# Altium PCB Speedometer_Tech.PcbDoc (part 3 of 4)
Units mm, origin at the board's own origin, x right, y up, seen from the top; angles counter-clockwise.
Board outline 309.2 x 103.7 mm, 4 copper layers (Top Layer, MidLayer1, MidLayer2, Bottom Layer), stack 0.603 mm thick; 246 components, 310 nets, 1253 pads, 701 vias.
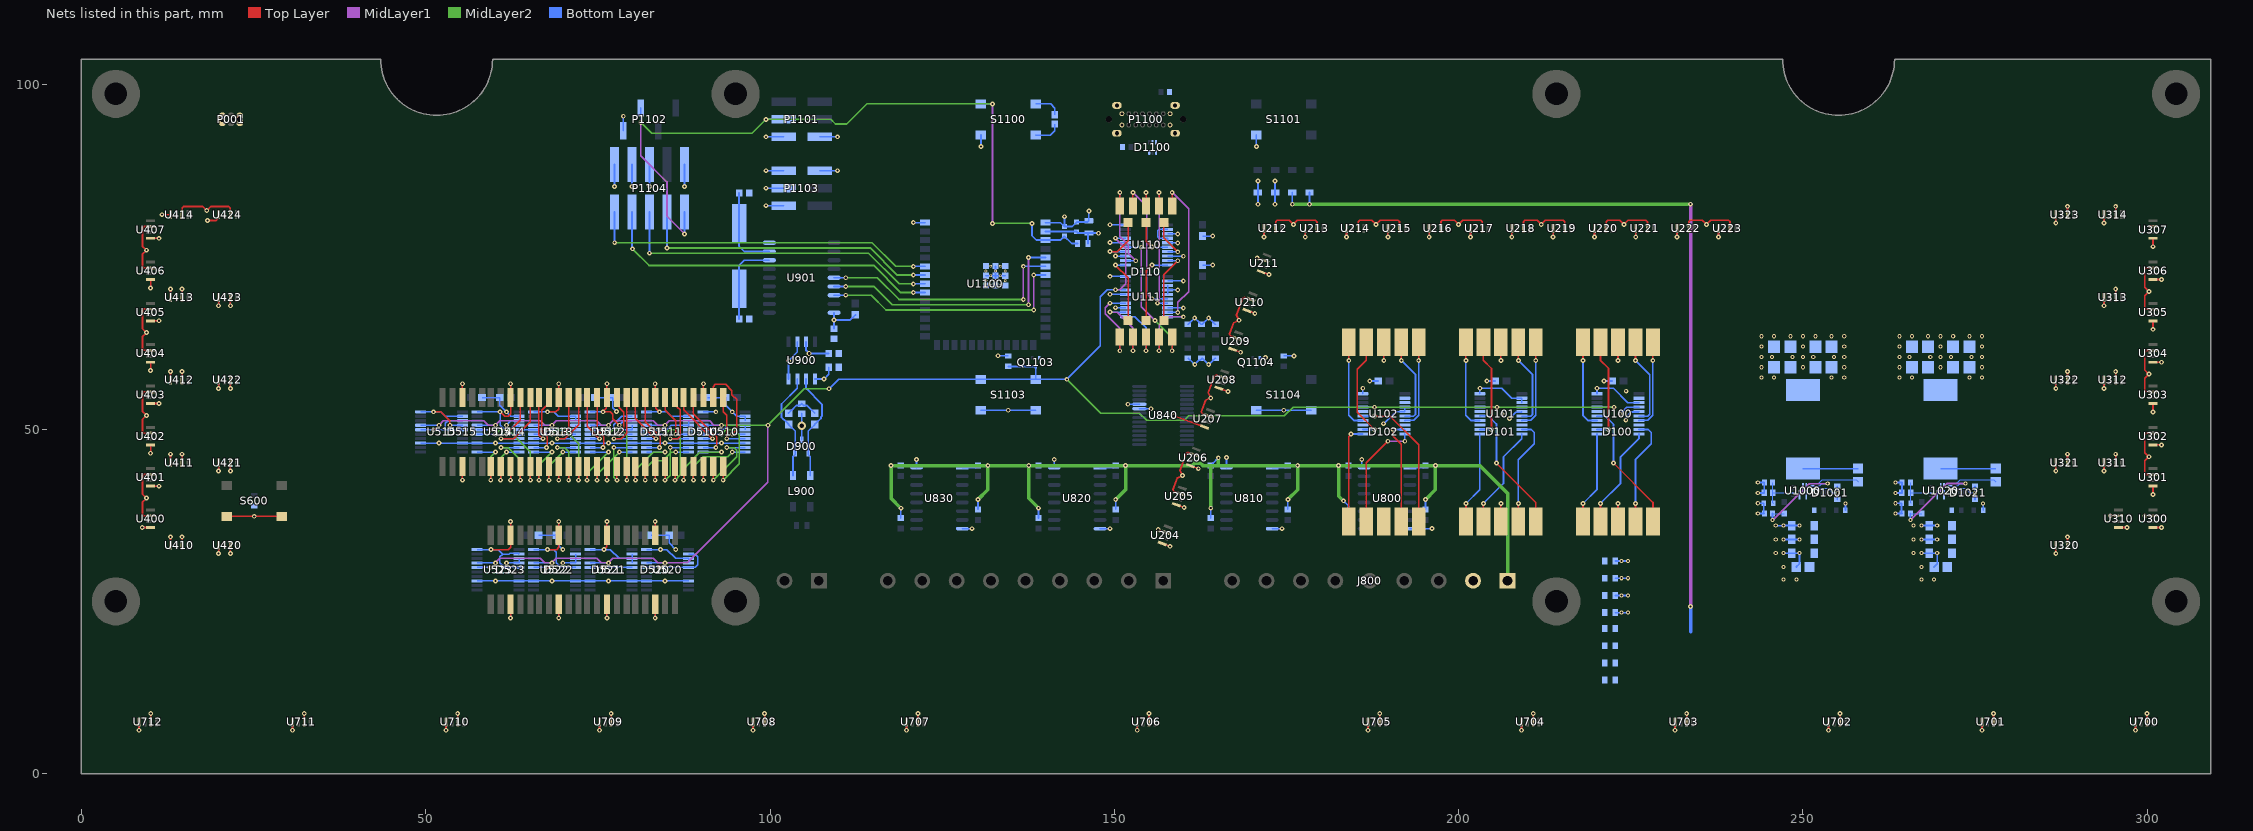
[diagram p4: the nets of this part, all layers, seen from the top]

## Via types
v1: diameter 0.7, hole 0.3, Top Layer to Bottom Layer, 568 vias
v2: diameter 0.6, hole 0.3, Top Layer to Bottom Layer, 96 vias
v3: diameter 1.27, hole 0.711, Top Layer to Bottom Layer, 33 vias
v4: diameter 0.7, hole 0.4, Top Layer to Bottom Layer, 4 vias

## Nets (pads, with @x,y where several pads share a name; then routed paths per layer and width w, separated by ;. In a path a pad name is that pad's centre, name@x,y a point inside that pad or via, vN(x,y) a via of type N, cw(c..) or ccw(c..) an arc to the next point about the centre after c; other vN are vias at no path point)
3V3: C901.2 C903.2 C1007.1 C1008.1 C1009.1 C1010.1 C1011.1 C1102.1 C1103.2 L1001.2 P1103.2 P1104.1 R840.2 R841.2 R842.2 R903.2 R1004.2 R1100.1 S600.3 S600.4 U800.16 U810.16 U820.16 U830.16 U840.9 U900.5 U901.18 U1100.2 | length 47.7
  Top Layer w0.254: S600.3@21.125,37.35 S600.4@29.075,37.35
  Bottom Layer w0.254: v1(77.42,85.231) P1104.1@77.42,88.43 ; v1(99.411,87.54) P1103.2@101.995,87.54 ; U900.5@106.505,57.3 v1(107.86,57.3) 108.525,57.965 C901.2@108.525,59 ; C903.2@109.3,64.606 v1(109.3,65.875) ; U901.18@109.3,66.92 v1(109.3,65.875) ; R903.2@112.395,66.622 112.395,66.585 111.991,66.181 111.954,66.181 111.648,65.875 v1(109.3,65.875) ; U830.16@121.275,44.445 v1(121.275,45.593) ; U1100.2@140,78.73 144.471,78.73 C1102.1@144.526,78.675 144.716,78.485 C1103.2@146.304,78.485 ; U820.16@141.275,44.445 v1(141.275,45.593) ; R1100.1@146.165,76.962 146.165,78.346 C1103.2@146.304,78.485 ; v1(147.701,78.458) 147.674,78.485 C1103.2@146.304,78.485 ; U840.9@153.65,52.975 v1(155.345,52.975) ; R840.2@160.655,65.235 160.755,65.235 161.028,65.508 161.028,65.511 v1(161.671,66.154) 162.314,65.511 162.314,65.508 162.587,65.235 R841.2@162.687,65.235 162.787,65.235 R841.2@163.06,65.508 ; R841.2@163.06,65.511 v1(163.703,66.154) R842.2@164.346,65.511 ; R842.2@164.346,65.508 164.619,65.235 R842.2@164.719,65.235 ; U810.16@166.275,44.445 v1(166.275,45.87) ; U800.16@185.928,44.45 v1(185.928,45.598) ; v2(243.45,40.75) R1004.2@244.375,40.75 244.4,40.775 C1007.1@244.4,42.25 v2(243.45,42.25)
  other v1: 25.1,37.35
  other v2: 250,59 248.5,60.5 250,60.5 251.5,60.5 250,62 248.176,63.5 250,63.5 251.824,63.5
5V: C902.2 C1027.1 C1028.1 C1029.1 C1030.1 C1031.1 D100.A D101.A D102.A D110.14 D510.A D511.A D512.A D513.A D514.A D515.A D520.A D521.A D522.A D523.A D1103.1 D1104.1 L1021.2 P001.3 P1103.1 R1024.2 R1103.2 R1104.2 U100.3 U100.5 U100.20 U101.2 U101.3 U101.5 U101.20 U102.4 U102.5 U102.20 U110.2 U110.4 U110.5 U110.20 U111.3 U111.4 U111.5 U111.20 U204.2 U205.2 U206.2 U207.2 U208.2 U209.2 U210.2 U211.2 U212.2 U213.2 U214.2 U215.2 U216.2 U217.2 U218.2 U219.2 U220.2 U221.2 U222.2 U223.2 U300.2 U301.2 U302.2 U303.2 U304.2 U305.2 U306.2 U307.2 U310.2 U311.2 U312.2 U313.2 U314.2 U320.2 U321.2 U322.2 U323.2 U400.2 U401.2 U402.2 U403.2 U404.2 U405.2 U406.2 U407.2 U410.2 U411.2 U412.2 U413.2 U414.2 U420.2 U421.2 U422.2 U423.2 U424.2 U510.20 U511.2 U511.20 U512.3 U512.20 U513.2 U513.3 U513.20 U514.4 U514.20 U515.2 U515.4 U515.20 U520.3 U520.4 U520.20 U521.2 U521.3 U521.4 U521.20 U522.5 U522.20 U523.2 U523.5 U523.20 U700.2 U701.2 U702.2 U703.2 U704.2 U705.2 U706.2 U707.2 U708.2 U709.2 U710.2 U711.2 U712.2 U900.3 | length 403
  Top Layer w0.2: v1(51.13,52.525) 52.2,52.525 53.5,51.225 53.5,50.586 v1(53.51,50.575) ; v1(55.32,42.6) D515.A@55.32,44.6 ; D515.A@55.32,54.6 v1(55.32,56.6) ; v1(59.48,32.525) 61.995,32.525 62.32,32.85 D523.A@62.32,34.6 v1(62.32,36.6) ; v1(60.8,52.525) 60.8,52.516 61.441,51.875 61.98,51.875 62.36,52.256 62.36,52.794 62.32,52.834 D514.A@62.32,54.6 v1(62.32,56.6) ; v1(62.32,22.6) D523.A@62.32,24.6 ; v1(62.32,42.6) D514.A@62.32,44.6 ; v1(67.68,32.525) 68.991,32.525 69.32,32.854 D522.A@69.32,34.6 v1(69.32,36.6) ; v1(67.68,52.525) 68.908,52.525 69.283,52.9 69.283,54.563 D513.A@69.32,54.6 v1(69.32,56.6) ; v1(69.32,22.6) D522.A@69.32,24.6 ; v1(69.32,42.6) D513.A@69.32,44.6 ; v1(75.88,32.525) 76.32,32.965 D521.A@76.32,34.6 v1(76.32,36.6) ; v1(76.32,22.6) D521.A@76.32,24.6 ; v1(76.32,42.6) D512.A@76.32,44.6 ; v1(76.32,56.6) D512.A@76.32,54.6 76.222,54.502 76.222,53.017 v1(75.73,52.525) 76.8,52.525 77.18,52.144 77.18,51.505 v1(78.11,50.575) ; v1(83.32,22.6) D520.A@83.32,24.6 ; D520.A@83.32,34.6 v1(83.32,36.6) ; v1(83.32,42.6) D511.A@83.32,44.6 ; v1(83.32,56.6) D511.A@83.32,54.6 83.438,54.482 83.438,53.017 v1(83.93,52.525) ; v1(90.32,42.6) D510.A@90.32,44.6 ; D510.A@90.32,54.6 v1(90.32,56.6) ; D110.14@154.6,82.398 v1(154.6,84.398)
  Top Layer w0.254: U400.2@10.05,37.425 9.064,37.425 8.858,37.631 8.858,39.408 v1(9.45,40) 8.858,40.592 8.858,43.19 9.093,43.425 U401.2@10.05,43.425 ; U402.2@10.05,49.425 9.064,49.425 8.858,49.631 8.858,51.408 v1(9.45,52) 8.858,52.592 8.858,55.19 9.093,55.425 U403.2@10.05,55.425 ; U404.2@10.05,61.45 9.064,61.45 8.858,61.656 8.858,63.433 v1(9.45,64.025) 8.858,64.617 8.858,67.215 9.093,67.45 U405.2@10.05,67.45 ; U406.2@10.05,73.425 9.064,73.425 8.858,73.631 8.858,75.408 v1(9.45,76) 8.858,76.592 8.858,79.19 9.093,79.425 U407.2@10.05,79.425 ; U712.2@10.069,7.5 v1(10.069,8.72) ; U410.2@14.625,33.15 v1(14.625,34.37) ; U411.2@14.625,45.15 v1(14.625,46.37) ; U412.2@14.625,57.15 v1(14.625,58.37) ; U413.2@14.625,69.15 v1(14.625,70.37) ; U414.2@14.625,81.15 14.625,82.136 14.831,82.342 17.608,82.342 v1(18.2,81.75) 18.792,82.342 21.39,82.342 21.625,82.107 U424.2@21.625,81.15 ; v1(21.625,31.93) U420.2@21.625,33.15 ; v1(21.625,43.93) U421.2@21.625,45.15 ; v1(21.625,55.93) U422.2@21.625,57.15 ; v1(21.625,67.93) U423.2@21.625,69.15 ; U711.2@32.356,7.5 v1(32.356,8.72) ; U710.2@54.642,7.5 v1(54.642,8.72) ; U709.2@76.929,7.5 v1(76.929,8.72) ; U708.2@99.216,7.5 v1(99.216,8.72) ; U707.2@121.503,7.5 v1(121.503,8.72) ; U706.2@155.025,7.5 v1(155.025,8.72) ; v1(156.382,35.422) U204.2@157.528,35.005 ; U205.2@159.58,40.643 158.654,40.98 158.53,41.244 159.138,42.914 v1(159.897,43.268) 159.543,44.026 160.432,46.468 160.733,46.608 U206.2@161.632,46.281 ; U207.2@163.684,51.919 162.758,52.256 162.634,52.52 163.242,54.19 v1(164.001,54.544) 163.647,55.302 164.536,57.744 164.837,57.884 U208.2@165.736,57.557 ; U209.2@167.788,63.195 166.862,63.532 166.738,63.796 167.346,65.466 v1(168.105,65.82) 167.751,66.578 168.64,69.02 168.941,69.16 U210.2@169.84,68.833 ; v1(170.746,74.888) U211.2@171.892,74.471 ; U212.2@173.425,79.15 173.425,80.136 173.631,80.342 175.408,80.342 v1(176,79.75) 176.592,80.342 179.19,80.342 179.425,80.107 U213.2@179.425,79.15 ; U214.2@185.425,79.15 185.425,80.136 185.631,80.342 187.408,80.342 v1(188,79.75) 188.592,80.342 191.19,80.342 191.425,80.107 U215.2@191.425,79.15 ; U705.2@188.547,7.5 v1(188.547,8.72) ; v1(189.133,59.994) D102.A@189.133,62.6 ; U216.2@197.425,79.15 197.425,80.136 197.631,80.342 199.408,80.342 v1(200,79.75) 200.592,80.342 203.19,80.342 203.425,80.107 U217.2@203.425,79.15 ; D101.A@206.133,36.6 v1(206.133,39.206) ; v1(206.133,59.994) D101.A@206.133,62.6 ; U218.2@209.425,79.15 209.425,80.136 209.631,80.342 211.408,80.342 v1(212,79.75) 212.592,80.342 215.19,80.342 215.425,80.107 U219.2@215.425,79.15 ; U704.2@210.834,7.5 v1(210.834,8.72) ; U220.2@221.425,79.15 221.425,80.136 221.631,80.342 223.408,80.342 v1(224,79.75) 224.592,80.342 227.19,80.342 227.425,80.107 U221.2@227.425,79.15 ; D100.A@223.133,36.6 v1(223.133,39.206) ; v1(223.133,59.994) D100.A@223.133,62.6 ; U703.2@233.12,7.5 v1(233.12,8.72) ; U222.2@233.425,79.15 233.425,80.136 233.631,80.342 235.408,80.342 v1(236,79.75) 236.592,80.342 239.19,80.342 239.425,80.107 U223.2@239.425,79.15 ; U702.2@255.407,7.5 v1(255.407,8.72) ; U701.2@277.694,7.5 v1(277.694,8.72) ; U320.2@288.425,33.15 v1(288.425,34.37) ; U321.2@288.425,45.15 v1(288.425,46.37) ; U322.2@288.425,57.15 v1(288.425,58.37) ; U323.2@288.425,81.15 v1(288.425,82.37) ; v1(294.63,37.425) U310.2@295.85,37.425 ; U311.2@295.425,45.15 v1(295.425,46.37) ; U312.2@295.425,57.15 v1(295.425,58.37) ; U313.2@295.425,69.15 v1(295.425,70.37) ; U314.2@295.425,81.15 v1(295.425,82.37) ; v1(299.63,37.425) U300.2@300.85,37.425 ; U700.2@299.981,7.5 v1(299.981,8.72) ; U301.2@300.85,43.425 299.864,43.425 299.658,43.631 299.658,45.408 v1(300.25,46) 299.658,46.592 299.658,49.19 299.893,49.425 U302.2@300.85,49.425 ; U303.2@300.85,55.425 299.864,55.425 299.658,55.631 299.658,57.408 v1(300.25,58) 299.658,58.592 299.658,61.19 299.893,61.425 U304.2@300.85,61.425 ; U305.2@300.85,67.425 299.864,67.425 299.658,67.631 299.658,69.408 v1(300.25,70) 299.658,70.592 299.658,73.19 299.893,73.425 U306.2@300.85,73.425
  Bottom Layer w0.2: U515.20@49.27,52.525 v1(51.13,52.525) 52.2,52.525 52.85,51.875 U515.2@55.37,51.875 ; v1(53.51,50.575) U515.4@55.37,50.575 ; U523.20@57.47,32.525 v1(59.48,32.525) 60.502,32.525 61.152,31.875 ; U514.20@57.47,52.525 v1(60.8,52.525) 60.8,50.566 61.441,49.925 62.15,49.925 62.675,50.45 63.445,50.45 U514.4@63.57,50.575 ; U523.5@63.57,29.925 61.441,29.925 60.78,30.586 60.78,31.503 61.152,31.875 ; U523.2@63.57,31.875 63.445,32 62.218,32 62.093,31.875 61.152,31.875 ; U522.20@65.67,32.525 v1(67.68,32.525) 68.6,32.525 68.98,32.144 68.98,30.586 69.641,29.925 U522.5@71.77,29.925 ; U513.20@65.67,52.525 67.53,52.525 67.536,52.519 68.055,52.519 68.061,52.525 68.6,52.525 69.25,51.875 U513.2@71.77,51.875 U513.3@71.77,51.225 ; U521.20@73.87,32.525 v1(75.88,32.525) 76.8,32.525 78.1,31.225 U521.3@79.97,31.225 ; U512.20@73.87,52.525 v1(75.73,52.525) ; v1(78.11,50.575) 78.76,51.225 U512.3@79.97,51.225 ; U521.4@79.97,30.575 U521.3@79.97,31.225 ; U521.2@79.97,31.875 U521.3@79.97,31.225 ; U520.20@82.07,32.525 85,32.525 86.3,31.225 U520.3@88.17,31.225 U520.4@88.17,30.575 ; U511.20@82.07,52.525 v1(83.93,52.525) 85,52.525 85.65,51.875 U511.2@88.17,51.875 ; U510.20@90.27,52.525 v1(92.13,52.525) ; v1@133.121,60.65 R1103.2@134.6,60.65 ; v1@149.357,72.187 U111.20@151.636,72.187 ; v1@149.357,79.68 U110.20@151.636,79.68 ; U111.5@157.736,69.587 U111.4@157.736,70.237 ; U111.3@157.736,70.887 U111.4@157.736,70.237 ; U110.2@157.736,79.03 156.561,79.03 156.337,78.805 156.337,77.93 156.537,77.73 U110.4@157.736,77.73 U110.5@157.736,77.08 v1@159.215,77.08 ; v1@159.215,70.237 U111.4@157.736,70.237 ; R1104.2@174.6,60.65 v1@176.079,60.65
  Bottom Layer w0.254: U900.3@105.235,62.7 105.235,61.446 v4(105.681,61) C902.2@108.525,61 ; P1103.1@107.205,87.54 v1(109.789,87.54) ; v1(170.85,82.667) D1104.1@170.85,84.362 v1(170.85,86.057) ; v1(173.35,82.667) D1103.1@173.35,84.362 v1(173.35,86.057) ; U102.20@186.083,55.15 v1(186.083,55.945) ; v1(189.103,50.8) 190.853,52.55 U102.5@192.183,52.55 U102.4@192.183,53.2 ; U101.20@203.083,55.15 v1(203.083,55.945) 206.282,55.945 207.727,54.5 U101.2@209.183,54.5 U101.3@209.183,53.85 ; v1(207.391,51.562) 208.056,52.227 208.056,52.231 208.277,52.452 209.085,52.452 U101.5@209.183,52.55 ; U100.20@220.083,55.15 v1(220.083,55.945) 222.491,55.945 224.586,53.85 U100.3@226.183,53.85 ; v1(224.282,51.308) 224.3,51.326 224.3,51.816 224.983,52.499 226.133,52.499 U100.5@226.183,52.55 ; v2(263.45,40.75) 264.375,40.75 264.4,40.775 C1027.1@264.4,42.25 v2(263.45,42.25)
  other v1: 84.08,32.525 176.079,60.635 133.121,60.665 159.215,70.222 149.357,72.202 159.215,77.065 149.357,79.695
  other v2: 270,59 268.5,60.5 270,60.5 271.5,60.5 270,62 268.176,63.5 270,63.5 271.824,63.5
CAN_H: D900.2 L900.1 R901.1 U900.7 | length 16
  Bottom Layer w0.254: L900.1@103.35,43.275 103.35,46.03 103.65,46.33 D900.2@103.65,46.525 103.65,49.735 103.141,50.244 103.104,50.244 102.7,50.648 R901.1@102.7,50.685 102.7,50.721 102.054,51.367 102.011,51.367 101.669,51.709 101.669,53.663 103.965,55.959 U900.7@103.965,57.3
CAN_L: D900.1 L900.2 R900.2 U900.6 | length 16
  Bottom Layer w0.254: U900.6@105.235,57.3 105.235,55.928 107.531,53.632 107.531,51.895 107.412,51.776 107.412,51.59 107.189,51.367 107.182,51.367 106.941,51.125 106.904,51.125 106.5,50.721 R900.2@106.5,50.685 106.5,50.648 106.096,50.244 106.059,50.244 105.55,49.735 D900.1@105.55,46.525 105.55,46.33 105.85,46.03 L900.2@105.85,43.275
CS: U901.16 U1100.7 | length 36.7
  MidLayer1 w0.254: v1(138.303,67.31) v1(138.303,72.39)
  MidLayer2 w0.254: v1(110.995,69.46) 114.69,69.46 116.84,67.31 v1(138.303,67.31)
  Bottom Layer w0.254: U901.16@109.3,69.46 v1(110.995,69.46) ; v1(138.303,72.39) 138.313,72.38 U1100.7@140,72.38
D\I\G\-\R\S\T\: Q1103.3 R1103.1 S1103.3 S1103.4 U100.17 U101.17 U102.17 U110.17 U111.17 U510.17 U511.17 U512.17 U513.17 U514.17 U515.17 U520.17 U521.17 U522.17 U523.17 | length 301.5
  MidLayer1 w0.2: v1(51.93,50.575) 52.58,51.225 58.411,51.225 59.061,50.575 v1(60.13,50.575) 60.78,51.225 66.611,51.225 67.261,50.575 v1(68.33,50.575) 68.98,51.225 74.811,51.225 75.461,50.575 v1(76.53,50.575) 77.18,51.225 83.011,51.225 83.661,50.575 v1(84.73,50.575) 85.38,51.225 91.211,51.225 91.861,50.575 v1(92.93,50.575) ; v1(60.13,30.575) 60.78,31.225 66.611,31.225 67.261,30.575 v1(68.33,30.575) 68.98,31.225 74.811,31.225 75.461,30.575 v1(76.53,30.575) 77.18,31.225 83.011,31.225 83.661,30.575 v1(84.73,30.575) 87.979,30.575 99.695,42.291 v1(99.695,50.575) ; v1(150.157,70.252) 150.776,70.252 151.636,71.112 151.636,76.266 v1(150.157,77.745)
  MidLayer2 w0.2: v1(92.93,50.575) v1(99.695,50.575) 105,55.88 v1(108.585,55.88) ; v1(143.102,57.25) 148.027,52.325 153.65,52.325 154.674,51.301 160.176,51.301 160.818,51.943 174.712,51.943 175.969,53.2 v1(187.778,53.2) v1(205.578,53.2) v1(222.578,53.2)
  Bottom Layer w0.2: U515.17@49.27,50.575 v1(51.93,50.575) ; U523.17@57.47,30.575 v1(60.13,30.575) ; U514.17@57.47,50.575 v1(60.13,50.575) ; U522.17@65.67,30.575 v1(68.33,30.575) ; U513.17@65.67,50.575 v1(68.33,50.575) ; U521.17@73.87,30.575 v1(76.53,30.575) ; U512.17@73.87,50.575 v1(76.53,50.575) ; U520.17@82.07,30.575 v1(84.73,30.575) ; U511.17@82.07,50.575 v1(84.73,50.575) ; U510.17@90.27,50.575 v1(92.93,50.575) ; S1103.4@138.575,57.25 v1(143.102,57.25) 147.955,62.103 147.955,69.215 148.992,70.252 v1(150.157,70.252) ; v1@150.157,70.237 U111.17@151.636,70.237 ; v1@150.157,77.73 U110.17@151.636,77.73
  Bottom Layer w0.254: v1(108.585,55.88) 109.955,57.25 S1103.3@130.625,57.25 S1103.4@138.575,57.25 Q1103.3@138.575,59.102 134.648,59.102 R1103.1@134.6,59.15 ; U102.17@186.083,53.2 v1(187.778,53.2) ; U101.17@203.083,53.2 v1(205.578,53.2) ; U100.17@220.083,53.2 v1(222.578,53.2)
EN: C1101.1 P1101.4 P1102.3 P1104.10 R1100.2 S1100.3 U1100.3 | length 114.9
  MidLayer1 w0.254: v1(81.23,94.555) 81.23,89.7 85.04,85.89 85.04,80.911 v1(87.58,78.371) ; v1(132.32,79.895) v1(132.32,97.25)
  MidLayer2 w0.2: v1@132.32,79.883 v1(138.049,79.883)
  MidLayer2 w0.254: v1(81.23,94.555) 82.821,92.964 97.375,92.964 v1(99.411,95) 108.832,95 109.513,94.319 111.151,94.319 114.082,97.25 v1(132.32,97.25)
  Bottom Layer w0.254: v1(81.23,94.555) P1102.3@81.23,96.655 ; v1(87.58,78.371) P1104.10@87.58,81.57 ; v1(99.411,95) P1101.4@101.995,95 ; S1100.3@130.625,97.25 v1(132.32,97.25) ; v1(138.049,79.883) 138.049,78.105 138.694,77.46 U1100.3@140,77.46 142.168,77.46 C1101.1@142.748,78.04 143.826,76.962 R1100.2@144.665,76.962
GND: C900.2 C901.1 C902.1 C903.1 C904.1 C905.1 C1001.2 C1002.2 C1003.2 C1004.1 C1005.2 C1008.2 C1009.2 C1010.2 C1011.2 C1021.2 C1022.2 C1023.2 C1024.1 C1025.2 C1028.2 C1029.2 C1030.2 C1031.2 C1101.2 C1102.2 C1103.1 D900.3 D1001.1 D1001.2 D1021.1 D1021.2 D1100.2 D1100.3 D1100.4 D1100.6 P001.1 P1100.A1 P1100.A12 P1100.B1 P1100.B12 P1100.M_GND P1101.5 P1101.6 P1102.4 P1103.4 P1103.6 P1104.3 P1104.5 P1104.9 Q1103.2 Q1104.2 R000.2 R001.2 R002.2 R003.2 R100.2 R101.2 R102.2 R110.2 R111.2 R510.2 R511.2 R512.2 R513.2 R514.2 R515.2 R520.2 R521.2 R522.2 R523.2 R600.1 R843.1 R844.1 R845.1 R1002.1 R1005.1 R1022.1 R1025.1 R1101.2 R1102.2 S1100.1 S1101.1 S1103.1 S1103.2 S1104.1 S1104.2 U100.2 U100.4 U100.8 U100.13 U100.16 U101.4 U101.8 U101.13 U101.16 U102.2 U102.3 U102.8 U102.13 U102.16 U110.3 U110.8 U110.13 U110.16 U111.2 U111.8 U111.13 U111.16 U204.4 U205.4 U206.4 U207.4 U208.4 U209.4 U210.4 U211.4 U212.4 U213.4 U214.4 U215.4 U216.4 U217.4 U218.4 U219.4 U220.4 U221.4 U222.4 U223.4 U300.4 U301.4 U302.4 U303.4 U304.4 U305.4 U306.4 U307.4 U310.4 U311.4 U312.4 U313.4 U314.4 U320.4 U321.4 U322.4 U323.4 U400.4 U401.4 U402.4 U403.4 U404.4 U405.4 U406.4 U407.4 U410.4 U411.4 U412.4 U413.4 U414.4 U420.4 U421.4 U422.4 U423.4 U424.4 U510.2 U510.3 U510.4 U510.5 U510.8 U510.13 U510.16 U511.3 U511.4 U511.5 U511.8 U511.13 U511.16 U512.2 U512.4 U512.5 U512.8 U512.13 U512.16 U513.4 U513.5 U513.8 U513.13 U513.16 U514.2 U514.3 U514.5 U514.8 U514.13 U514.16 U515.3 U515.5 U515.8 U515.13 U515.16 U520.2 U520.5 U520.8 U520.13 U520.16 U521.5 U521.8 U521.13 U521.16 U522.2 U522.3 U522.4 U522.8 U522.13 U522.16 U523.3 U523.4 U523.8 U523.13 U523.16 U700.4 U701.4 U702.4 U703.4 U704.4 U705.4 U706.4 U707.4 U708.4 U709.4 U710.4 U711.4 U712.4 U800.8 U810.8 U820.8 U830.8 U840.10 U900.2 U900.8 U901.9 U1000.2 U1000.10 U1020.2 U1020.10 U1100.1 U1100.40 U1100.41 | length 426.1
  Top Layer w0.254: v1(8.368,6.28) U712.4@8.368,7.5 ; v1(8.83,35.725) U400.4@10.05,35.725 ; U401.4@10.05,41.725 v1(11.27,41.725) ; v1(10.05,46.505) U402.4@10.05,47.725 ; U403.4@10.05,53.725 v1(11.27,53.725) ; v1(10.05,58.505) U404.4@10.05,59.725 ; U405.4@10.05,65.75 v1(11.27,65.75) ; v1(10.05,70.505) U406.4@10.05,71.725 ; U407.4@10.05,77.725 v1(11.27,77.725) ; v1(11.705,81.15) U414.4@12.925,81.15 ; U410.4@12.925,33.15 v1(12.925,34.37) ; U411.4@12.925,45.15 v1(12.925,46.37) ; U412.4@12.925,57.15 v1(12.925,58.37) ; U413.4@12.925,69.15 v1(12.925,70.37) ; v1(18.295,80.3) 19.515,80.3 19.842,80.627 19.925,80.71 U424.4@19.925,81.15 ; v1(19.925,31.93) U420.4@19.925,33.15 ; v1(19.925,43.93) U421.4@19.925,45.15 ; v1(19.925,55.93) U422.4@19.925,57.15 ; v1(19.925,67.93) U423.4@19.925,69.15 ; v1(30.655,6.28) U711.4@30.655,7.5 ; v1(52.942,6.28) U710.4@52.942,7.5 ; v1(75.229,6.28) U709.4@75.229,7.5 ; v1(97.516,6.28) U708.4@97.516,7.5 ; v1(119.803,6.28) U707.4@119.803,7.5 ; v1(153.325,6.28) U706.4@153.325,7.5 ; U204.4@156.947,33.407 v1(158.093,32.99) ; v1(158.626,51.951) U207.4@163.103,50.321 ; U205.4@158.999,39.045 v1(160.145,38.628) ; U206.4@161.051,44.683 v1(162.197,44.266) ; U208.4@165.155,55.959 v1(166.488,55.474) ; U209.4@167.207,61.597 v1(168.353,61.18) ; U210.4@169.259,67.235 v1(170.405,66.818) ; U211.4@171.311,72.873 v1(172.457,72.456) ; v1(171.725,77.93) U212.4@171.725,79.15 ; v1(177.725,77.93) U213.4@177.725,79.15 ; v1(183.725,77.93) U214.4@183.725,79.15 ; v1(186.846,6.28) U705.4@186.846,7.5 ; v1(189.725,77.93) U215.4@189.725,79.15 ; v1(195.725,77.93) U216.4@195.725,79.15 ; v1(201.725,77.93) U217.4@201.725,79.15 ; v1(207.725,77.93) U218.4@207.725,79.15 ; v1(209.133,6.28) U704.4@209.133,7.5 ; v1(213.725,77.93) U219.4@213.725,79.15 ; v1(219.725,77.93) U220.4@219.725,79.15 ; v1(225.725,77.93) U221.4@225.725,79.15 ; v1(231.42,6.28) U703.4@231.42,7.5 ; v1(231.725,77.93) U222.4@231.725,79.15 ; v1(237.725,77.93) U223.4@237.725,79.15 ; v1(253.707,6.28) U702.4@253.707,7.5 ; v1(275.994,6.28) U701.4@275.994,7.5 ; v1(286.725,31.93) U320.4@286.725,33.15 ; v1(286.725,43.93) U321.4@286.725,45.15 ; v1(286.725,55.93) U322.4@286.725,57.15 ; v1(286.725,79.93) U323.4@286.725,81.15 ; v1(293.725,43.93) U311.4@293.725,45.15 ; v1(293.725,55.93) U312.4@293.725,57.15 ; v1(293.725,67.93) U313.4@293.725,69.15 ; v1(293.725,79.93) U314.4@293.725,81.15 ; U310.4@295.85,35.725 v1(297.07,35.725) ; v1(298.281,6.28) U700.4@298.281,7.5 ; U300.4@300.85,35.725 v1(302.07,35.725) ; v1(300.85,40.505) U301.4@300.85,41.725 ; U302.4@300.85,47.725 v1(302.07,47.725) ; v1(300.85,52.505) U303.4@300.85,53.725 ; U304.4@300.85,59.725 v1(302.07,59.725) ; v1(300.85,64.505) U305.4@300.85,65.725 ; U306.4@300.85,71.725 v1(302.07,71.725) ; v1(300.85,76.505) U307.4@300.85,77.725
  Bottom Layer w0.15: U1000.10@251.4,41.25 252.261,41.25 252.436,41.425 253.583,41.425 254.258,40.75 v2(255,40.75) ; U1020.10@271.4,41.25 272.261,41.25 272.436,41.425 273.583,41.425 274.258,40.75 v2(275,40.75)
  Bottom Layer w0.2: U515.13@49.27,47.975 v1(51.93,47.975) U515.8@55.37,47.975 U514.13@57.47,47.975 v1(60.13,47.975) U514.8@63.57,47.975 U513.13@65.67,47.975 v1(68.33,47.975) U513.8@71.77,47.975 U512.13@73.87,47.975 v1(76.53,47.975) U512.8@79.97,47.975 U511.13@82.07,47.975 v1(84.73,47.975) U511.8@88.17,47.975 U510.13@90.27,47.975 v1(92.93,47.975) U510.8@96.37,47.975 ; U515.16@49.27,49.925 v1(51.13,49.925) 52.845,49.925 ; U515.5@55.37,49.925 52.845,49.925 ; U515.3@55.37,51.225 53.241,51.225 52.86,50.844 52.86,49.94 52.845,49.925 ; U523.13@57.47,27.975 v1(60.13,27.975) U523.8@63.57,27.975 U522.13@65.67,27.975 v1(68.33,27.975) U522.8@71.77,27.975 U521.13@73.87,27.975 v1(76.53,27.975) U521.8@79.97,27.975 U520.13@82.07,27.975 v1(84.73,27.975) U520.8@88.17,27.975 ; U523.16@57.47,29.925 v1(59.33,29.925) ; U514.16@57.47,49.925 v1(59.33,49.925) ; R515.2@58.186,54.6 R514.2@60.755,54.6 60.755,53.489 61.71,52.534 v1(61.71,52.525) 62.36,51.875 U514.2@63.57,51.875 U514.3@63.57,51.225 62.36,51.225 v1(61.71,50.575) ; v1(61.71,30.575) U523.4@63.57,30.575 U523.3@63.57,31.225 ; U514.5@63.57,49.925 U513.16@65.67,49.925 v1(67.53,49.925) U513.5@71.77,49.925 U513.4@71.77,50.575 ; U522.16@65.67,29.925 v1(67.53,29.925) ; R523.2@66.386,34.6 R522.2@68.955,34.6 68.955,33.48 v1(69.91,32.525) ; v1(69.91,30.575) U522.4@71.77,30.575 U522.3@71.77,31.225 U522.2@71.77,31.875 ; U521.16@73.87,29.925 v1(75.73,29.925) U521.5@79.97,29.925 ; U512.16@73.87,49.925 v1(75.73,49.925) 77.298,49.925 ; R513.2@74.586,54.6 R512.2@77.155,54.6 77.155,53.147 v1(77.724,52.578) ; U512.4@79.97,50.575 U512.5@79.97,49.925 77.298,49.925 ; U512.2@79.97,51.875 78.491,51.875 77.298,50.682 77.298,49.925 ; U520.16@82.07,29.925 v1(83.93,29.925) U520.5@88.17,29.925 88.212,29.967 89.149,29.967 89.47,30.288 89.47,31.473 89.068,31.875 U520.2@88.17,31.875 ; U511.16@82.07,49.925 v1(83.93,49.925) 83.936,49.919 84.455,49.919 84.461,49.925 85,49.925 85.65,50.575 U511.4@88.17,50.575 ; R521.2@82.786,34.6 R520.2@85.355,34.6 85.355,33.48 v1(86.31,32.525) ; U511.5@88.17,49.925 U511.4@88.17,50.575 ; U511.3@88.17,51.225 U511.4@88.17,50.575 ; U510.16@90.27,49.925 v1(92.13,49.925) 92.136,49.919 92.655,49.919 92.661,49.925 93.2,49.925 93.85,50.575 U510.4@96.37,50.575 U510.5@96.37,49.925 ; R511.2@90.985,54.6 R510.2@93.555,54.6 93.555,53.48 v1(94.51,52.525) 95.16,51.875 U510.2@96.37,51.875 U510.3@96.37,51.225 ; v1@149.357,69.587 U111.16@151.636,69.587 ; v1@149.357,77.08 U110.16@151.636,77.08 ; v1@150.157,67.637 U111.13@151.636,67.637 ; v1@150.157,75.13 U110.13@151.636,75.13 ; U111.8@157.736,67.637 v1@160.015,67.637 ; U111.2@157.736,71.537 v1@160.015,71.537 ; U110.8@157.736,75.13 v1@160.015,75.13 ; U110.3@157.736,78.38 v1@159.215,78.38 ; R111.2@162.814,73.84 v1@164.293,73.84 ; R110.2@162.814,78.052 v1@164.293,78.052 ; Q1104.2@171.125,60.397 v1(171.958,60.397) ; v2(246.05,36) v2(247.2,36)
  Bottom Layer w0.254: P1102.4@78.69,93.345 v1(78.69,95.445) ; v1(79.96,85.231) P1104.3@79.96,88.43 ; v1(82.5,85.231) P1104.5@82.5,88.43 ; v1(87.58,85.231) P1104.9@87.58,88.43 ; v1(99.411,82.46) P1103.6@101.995,82.46 ; v1(99.411,85) P1103.4@101.995,85 ; v1(99.411,92.46) P1101.6@101.995,92.46 ; U900.8@102.695,57.3 v4(102.695,59.944) 103.965,61.214 U900.2@103.965,62.7 ; D900.3@104.6,48.475 v3(104.6,50.5) C900.2@104.6,52.275 ; P1101.5@107.205,92.46 v1(109.789,92.46) ; v1(120.805,80) U1100.40@122.5,80 ; U830.8@127.925,35.555 v1(129.35,35.555) ; S1103.1@130.625,52.75 v1(134.6,52.75) S1103.2@138.575,52.75 ; v1(130.625,91.055) S1100.1@130.625,92.75 ; U1100.41@131.35,72.28 U1100.41@132.05,72.28 U1100.41@132.75,72.28 ; U1100.41@132.75,70.88 U1100.41@132.75,71.58 U1100.41@132.75,72.28 ; U1100.41@132.75,73.68 U1100.41@132.75,72.98 U1100.41@132.75,72.28 ; U1100.41@134.15,72.28 U1100.41@133.45,72.28 U1100.41@132.75,72.28 ; U1100.1@140,80 142.188,80 C1101.2@142.748,79.44 ; v1(142.748,80.865) C1101.2@142.748,79.44 ; v1(146.304,81.7) C1103.1@146.304,80.275 146.104,80.075 C1102.2@144.526,80.075 143.891,79.44 C1101.2@142.748,79.44 ; U820.8@147.925,35.555 v1(149.35,35.555) ; v1(151.955,53.625) U840.10@153.65,53.625 ; R843.1@160.755,60.306 160.755,60.275 161.028,60.002 161.06,60.002 v1(161.687,59.375) 161.687,59.403 162.286,60.002 162.483,60.002 162.787,60.306 R844.1@163.06,60.033 ; R844.1@163.06,60.03 v1(163.703,59.387) R845.1@164.346,60.03 ; R845.1@164.346,60.033 164.619,60.306 R845.1@164.719,60.306 ; S1104.1@170.625,52.75 v1(174.6,52.75) S1104.2@178.575,52.75 ; v1(170.625,91.055) S1101.1@170.625,92.75 ; U810.8@172.925,35.555 v1(174.35,35.555) ; v1(187.098,57) R102.2@188.318,57 ; U800.8@192.925,35.56 v1(196.116,35.56) ; v1(204.098,57) R101.2@205.318,57 ; v1(221.098,57) R100.2@222.318,57 ; R003.2@222.75,23.361 224.403,23.361 224.48,23.438 v2@224.573,23.438 ; R002.2@222.75,25.861 224.403,25.861 224.48,25.938 v2@224.573,25.938 ; R001.2@222.75,28.361 224.403,28.361 224.48,28.438 v2@224.573,28.438 ; R000.2@222.75,30.861 224.403,30.861 224.48,30.938 v2@224.573,30.938 ; v1(223.424,52.204) 224.42,53.2 U100.4@226.183,53.2 ; v2@243.373,39.25 v2(243.45,39.25) R1005.1@244.323,39.25 244.323,37.827 C1005.2@244.4,37.75 v2(243.45,37.75) ; v2(247.2,32) C1001.2@248.35,32 v2(249.5,32) 249.5,30.45 C1004.1@249.05,30 ; v2(247.2,34) C1002.2@248.35,34 v2(249.5,34) ; v2(247.2,36) C1003.2@248.35,36 v2(249.5,36) ; D1001.2@255,39.8 v2(255,40.75) D1001.1@255,41.7 ; R1002.1@256.177,38.25 v2(256.177,39.2) ; v2@263.373,39.25 v2(263.45,39.25) R1025.1@264.323,39.25 264.323,37.827 C1025.2@264.4,37.75 v2(263.45,37.75) ; v2(267.2,32) C1021.2@268.35,32 v2(269.5,32) 269.5,30.45 C1024.1@269.05,30 ; v2(267.2,34) C1022.2@268.35,34 v2(269.5,34) ; v2(267.2,36) C1023.2@268.35,36 v2(269.5,36) ; D1021.2@275,39.8 v2(275,40.75) D1021.1@275,41.7 ; R1022.1@276.177,38.25 v2(276.177,39.2)
  other v1: 206.329,52.225 224.339,55.525 160.015,67.622 150.157,67.652 149.357,69.602 160.015,71.522 164.293,73.825 160.015,75.115 150.157,75.145 149.357,77.095 164.293,78.037 159.215,78.365
  other v2: 223.662,23.361 224.573,23.361 223.662,25.861 224.573,25.861 247.2,28.15 249.05,28.15 267.2,28.15 269.05,28.15 223.662,28.361 224.573,28.361 247.2,30 267.2,30 223.662,30.861 224.573,30.861 246.05,32 266.05,32 246.05,34 266.05,34 266.05,36 244,57.5 245.824,57.5 254.176,57.5 256,57.5 264,57.5 265.824,57.5 274.176,57.5 276,57.5 244,59 256,59 264,59 276,59 244,60.5 245.5,60.5 254.5,60.5 256,60.5 264,60.5 265.5,60.5 274.5,60.5 276,60.5 244,62 256,62 264,62 276,62 244,63.5 245.824,63.5 254.176,63.5 256,63.5 264,63.5 265.824,63.5 274.176,63.5 276,63.5
KL30: J800.1 R004.1 R005.1 R006.1 R007.1 R800.1 R801.1 R802.1 R803.1 R810.1 R811.1 R812.1 R813.1 R820.1 R821.1 R822.1 R823.1 R830.1 R831.1 R832.1 R833.1 U800.1 U810.1 U820.1 U830.1 | length 186.5
  MidLayer2 w0.508: v1(117.575,44.752) v1@117.575,44.728 ; v1(119,38.534) 117.575,39.959 v1@117.575,44.728 ; v1(130.2,39.784) 131.625,41.209 v1@131.625,44.728 ; v1(131.625,44.752) v1@131.625,44.728 ; v1(139,38.534) 137.575,39.959 v1(137.575,44.728) ; v1(150.2,39.784) 151.625,41.209 v1(151.625,44.728) ; v1(164,38.534) 164,44.728 ; v1(165.1,45.847) 165.1,44.728 ; v1(175.2,39.784) 176.625,41.209 v1(176.625,44.728) ; v1(183.261,39.6) 182.575,40.286 v1(182.575,44.728) ; v1(195.2,39.784) 196.625,41.209 v1(196.625,44.728) ; J800.1@207.1,28 207.1,40.677 203.049,44.728 v1(196.625,44.728) ; v1@117.575,44.728 v1@131.625,44.728 ; v1@131.625,44.728 v1(137.575,44.728) ; v1(137.575,44.728) v1(151.625,44.728) ; v1(151.625,44.728) 161.295,44.728 161.637,45.07 162.53,45.07 162.872,44.728 164,44.728 ; 164,44.728 165.1,44.728 ; 165.1,44.728 v1(176.625,44.728) ; v1(176.625,44.728) v1(182.575,44.728) ; v1(182.575,44.728) v1(196.625,44.728)
  Bottom Layer w0.254: v1(117.575,44.752) R833.1@119,44.752 ; R832.1@119,37.108 v1(119,38.534) ; U830.1@127.925,44.445 129.917,44.445 R830.1@130.2,44.728 ; R831.1@130.2,38.359 v1(130.2,39.784) ; R830.1@130.2,44.752 v1(131.625,44.752) ; v1(137.575,44.728) R823.1@139,44.728 ; R822.1@139,37.108 v1(139,38.534) ; U820.1@147.925,44.445 149.917,44.445 R820.1@150.2,44.728 v1(151.625,44.728) ; R821.1@150.2,38.359 v1(150.2,39.784) ; R812.1@164,37.108 v1(164,38.534) ; R813.1@164,44.752 164.05,44.752 164.329,45.031 164.329,45.081 165.095,45.847 v1(165.1,45.847) ; U810.1@172.925,44.445 174.917,44.445 R810.1@175.2,44.728 v1(176.625,44.728) ; R811.1@175.2,38.359 v1(175.2,39.784) ; v1(182.575,44.728) R803.1@184,44.728 ; v1(183.261,39.6) 184,38.861 R802.1@184,37.108 ; U800.1@192.925,44.445 194.917,44.445 R800.1@195.2,44.728 v1(196.625,44.728) ; R801.1@195.2,38.359 v1(195.2,39.784)
KL30i: C1001.1 C1002.1 C1003.1 C1004.2 C1021.1 C1022.1 C1023.1 C1024.2 D1101.1 D1102.1 R004.2 R005.2 R006.2 R007.2 R1001.2 R1021.2 U1000.1 U1020.1 | length 123.3
  MidLayer1 w0.508: v1(233.68,24.257) v1(233.68,82.677)
  MidLayer2 w0.508: v1(175.85,82.667) v1(178.35,82.667) 233.67,82.667 v1(233.68,82.677)
  Bottom Layer w0.254: v1(175.85,82.667) D1102.1@175.85,84.362 ; v1(178.35,82.667) D1101.1@178.35,84.362
  Bottom Layer w0.508: 233.68,20.574 v1(233.68,24.257)
KL31: J800.2 R000.1 R001.1 R002.1 R003.1
MISO: U901.15 U1100.5 | length 38.7
  MidLayer1 w0.254: v1(137.541,68.072) v1(137.541,74.93)
  MidLayer2 w0.254: v1(110.995,70.73) 111.004,70.739 115.062,70.739 117.729,68.072 v1(137.541,68.072)
  Bottom Layer w0.254: U901.15@109.3,70.73 v1(110.995,70.73) ; v1(137.541,74.93) 137.551,74.92 U1100.5@140,74.92
MOSI: U901.14 U1100.6 | length 36.8
  MidLayer1 w0.254: v1(136.779,68.834) v1(136.779,73.66)
  MidLayer2 w0.254: v1(110.995,72) 111.004,72.009 115.57,72.009 118.745,68.834 v1(136.779,68.834)
  Bottom Layer w0.254: U901.14@109.3,72 v1(110.995,72) ; v1(136.779,73.66) 136.789,73.65 U1100.6@140,73.65
MTCK: P1104.4 U1100.32 | length 50.5
  MidLayer2 w0.254: v1(80.01,76.2) 82.423,73.787 115.062,73.787 119.009,69.84 v1(120.805,69.84)
  Bottom Layer w0.254: P1104.4@79.96,81.57 79.96,76.25 v1(80.01,76.2) ; v1(120.805,69.84) U1100.32@122.5,69.84
MTDI: P1104.8 U1100.34 | length 44.3
  MidLayer2 w0.254: v1(85.032,76.327) 114.554,76.327 118.501,72.38 v1(120.805,72.38)
  Bottom Layer w0.254: v1(85.032,76.327) 85.04,76.335 P1104.8@85.04,81.57 ; v1(120.805,72.38) U1100.34@122.5,72.38
MTDO: P1104.6 U1100.33 | length 47.9
  MidLayer2 w0.254: v1(82.487,75.565) 114.3,75.565 118.755,71.11 v1(120.805,71.11)
  Bottom Layer w0.254: v1(82.487,75.565) 82.5,75.578 P1104.6@82.5,81.57 ; v1(120.805,71.11) U1100.33@122.5,71.11
MTMS: P1104.2 U1100.35 | length 51
  MidLayer2 w0.254: v1(77.438,77.089) 114.808,77.089 118.247,73.65 v1(120.805,73.65)
  Bottom Layer w0.254: P1104.2@77.42,81.57 77.42,77.107 v1(77.438,77.089) ; v1(120.805,73.65) U1100.35@122.5,73.65
NetC900_1: C900.1 R900.1 R901.2 | length 5
  Bottom Layer w0.254: R901.2@102.7,52.315 102.7,52.352 103.104,52.756 103.141,52.756 103.843,53.458 104.333,53.458 C900.1@104.6,53.725 104.867,53.458 105.357,53.458 106.059,52.756 106.096,52.756 106.5,52.352 R900.1@106.5,52.315
NetC904_2: C904.2 U901.8 Y900.1 | length 12.4
  Bottom Layer w0.254: C904.2@95.5,84.302 Y900.1@95.5,79.925 95.5,76.585 96.275,75.81 U901.8@99.9,75.81
NetC905_2: C905.2 U901.7 Y900.2 | length 12.5
  Bottom Layer w0.254: C905.2@95.5,66 Y900.2@95.5,70.425 95.504,70.429 95.504,73.787 96.257,74.54 U901.7@99.9,74.54
NetC1005_1: C1005.1 R1003.1 U1000.9 | length 15.2
  MidLayer1 w0.2: v2(245.6,36.8) 250.9,42.1 v2(253.6,42.1)
  Bottom Layer w0.15: C1005.1@245.6,37.75 R1003.1@247.269,37.75 ; U1000.9@251.4,41.75 252.266,41.75 252.33,41.814 252.475,41.814 252.761,42.1 v2(253.6,42.1)
  Bottom Layer w0.254: v2(245.6,36.8) C1005.1@245.6,37.75
NetC1006_1: C1006.1 L1001.1 U1000.7 | length 8
  Bottom Layer w0.2: L1001.1@250,44.285 C1006.1@258,44.285
NetC1006_2: C1006.2 U1000.8 | length 7.9
  Bottom Layer w0.15: U1000.8@250.5,41.9 250.773,41.9 251.037,42.164 252.33,42.164 252.816,42.65 257.735,42.65 C1006.2@258,42.385
NetC1007_2: C1007.2 R1004.1 R1005.2 U1000.4 | length 6
  Bottom Layer w0.15: C1007.2@245.6,42.25 245.625,42.225 R1004.1@245.625,40.75 ; R1005.2@245.677,39.25 245.625,39.302 R1004.1@245.625,40.75 ; U1000.4@248.6,40.75 R1004.1@245.625,40.75
NetC1025_1: C1025.1 R1023.1 U1020.9 | length 15.2
  MidLayer1 w0.254: v2(265.6,36.8) 270.9,42.1 v2(273.6,42.1)
  Bottom Layer w0.15: C1025.1@265.6,37.75 R1023.1@267.269,37.75 ; U1020.9@271.4,41.75 272.266,41.75 272.33,41.814 272.475,41.814 272.761,42.1 v2(273.6,42.1)
  Bottom Layer w0.254: v2(265.6,36.8) C1025.1@265.6,37.75
NetC1026_1: C1026.1 L1021.1 U1020.7 | length 8
  Bottom Layer w0.2: L1021.1@270,44.285 C1026.1@278,44.285
NetC1026_2: C1026.2 U1020.8 | length 7.9
  Bottom Layer w0.15: U1020.8@270.5,41.9 270.773,41.9 271.038,42.165 272.332,42.165 272.816,42.65 277.735,42.65 C1026.2@278,42.385
NetC1027_2: C1027.2 R1024.1 R1025.2 U1020.4 | length 6
  Bottom Layer w0.15: C1027.2@265.6,42.25 265.625,42.225 R1024.1@265.625,40.75 ; R1025.2@265.677,39.25 265.625,39.302 R1024.1@265.625,40.75 ; U1020.4@268.6,40.75 R1024.1@265.625,40.75
NetC1100_1: C1100.1 S1100.4 | length 4
  Bottom Layer w0.2: S1100.4@138.575,97.25 140.748,97.25 141.351,96.647 C1100.1@141.351,95.677
NetC1100_2: C1100.2 S1100.2 | length 4
  Bottom Layer w0.2: S1100.2@138.575,92.75 138.615,92.71 140.716,92.71 141.351,93.345 C1100.2@141.351,94.323
NetD100_1: D100.1 U100.11 | length 13.5
  Top Layer w0.254: D100.1@218.066,36.6 v1(218.066,39.206)
  Bottom Layer w0.254: v1(218.066,39.206) 220.083,41.224 U100.11@220.083,49.3
NetD100_2: D100.2 U100.10 | length 15
  Top Layer w0.254: D100.2@220.593,36.6 v1(220.593,39.206)
  Bottom Layer w0.254: v1(220.593,39.206) 223.52,42.133 223.52,45.974 226.183,48.637 U100.10@226.183,49.3
NetD100_4: D100.4 U100.9 | length 15.8
  Top Layer w0.254: D100.4@225.673,36.6 v1(225.673,39.206)
  Bottom Layer w0.254: v1(225.673,39.206) 225.673,45.587 227.965,47.879 227.965,49.53 227.545,49.95 U100.9@226.183,49.95
NetD100_5: D100.5 U100.15 | length 19.4
  Top Layer w0.254: v1(222.486,45.085) 228.213,39.358 D100.5@228.213,36.6
  Bottom Layer w0.254: U100.15@220.083,51.9 220.085,51.898 221.283,51.898 222.486,50.695 v1(222.486,45.085)
NetD100_6: D100.6 U100.7 | length 12.9
  Top Layer w0.254: v1(228.201,59.994) D100.6@228.201,62.6
  Bottom Layer w0.254: U100.7@226.183,51.25 226.222,51.289 227.483,51.289 228.201,52.006 v1(228.201,59.994)
NetD100_7: D100.7 U100.6 | length 13
  Top Layer w0.254: v1(225.673,59.994) D100.7@225.673,62.6
  Bottom Layer w0.254: v1(225.673,59.994) 227.747,57.92 227.747,52.194 227.453,51.9 U100.6@226.183,51.9
NetD100_9: D100.9 U100.12 | length 14.8
  Top Layer w0.254: D100.9@220.593,62.6 220.593,59.994 221.778,58.809 v1(221.778,49.95)
  Bottom Layer w0.254: U100.12@220.083,49.95 v1(221.778,49.95)
NetD100_10: D100.10 U100.14 | length 12.9
  Top Layer w0.254: v1(218.053,59.994) D100.10@218.053,62.6
  Bottom Layer w0.254: v1(218.053,59.994) 218.053,52.019 218.822,51.25 U100.14@220.083,51.25
NetD101_1: D101.1 U101.11 | length 13.5
  Top Layer w0.254: D101.1@201.066,36.6 v1(201.066,39.206)
  Bottom Layer w0.254: v1(201.066,39.206) 203.083,41.224 U101.11@203.083,49.3
NetD101_2: D101.2 U101.10 | length 15
  Top Layer w0.254: D101.2@203.593,36.6 v1(203.593,39.206)
  Bottom Layer w0.254: v1(203.593,39.206) 206.52,42.133 206.52,45.974 209.183,48.637 U101.10@209.183,49.3
NetD101_4: D101.4 U101.9 | length 15.8
  Top Layer w0.254: D101.4@208.673,36.6 v1(208.673,39.206)
  Bottom Layer w0.254: v1(208.673,39.206) 208.673,45.587 210.965,47.879 210.965,49.53 210.545,49.95 U101.9@209.183,49.95
NetD101_5: D101.5 U101.15 | length 19.4
  Top Layer w0.254: v1(205.486,45.085) 211.213,39.358 D101.5@211.213,36.6
  Bottom Layer w0.254: U101.15@203.083,51.9 203.134,51.951 204.283,51.951 205.486,50.748 v1(205.486,45.085)
NetD101_6: D101.6 U101.7 | length 12.9
  Top Layer w0.254: v1(211.201,59.994) D101.6@211.201,62.6
  Bottom Layer w0.254: U101.7@209.183,51.25 209.222,51.289 210.483,51.289 211.201,52.006 v1(211.201,59.994)
NetD101_7: D101.7 U101.6 | length 13
  Top Layer w0.254: v1(208.673,59.994) D101.7@208.673,62.6
  Bottom Layer w0.254: v1(208.673,59.994) 210.747,57.92 210.747,52.194 210.453,51.9 U101.6@209.183,51.9
NetD101_9: D101.9 U101.12 | length 14.8
  Top Layer w0.254: D101.9@203.593,62.6 203.593,59.994 204.778,58.809 v1(204.778,49.95)
  Bottom Layer w0.254: U101.12@203.083,49.95 v1(204.778,49.95)
NetD101_10: D101.10 U101.14 | length 12.9
  Top Layer w0.254: v1(201.053,59.994) D101.10@201.053,62.6
  Bottom Layer w0.254: v1(201.053,59.994) 201.053,52.019 201.822,51.25 U101.14@203.083,51.25
NetD102_1: D102.1 U102.11 | length 14.5
  Top Layer w0.254: D102.1@184.053,36.6 184.053,48.928 184.388,49.263 v1(184.388,49.3)
  Bottom Layer w0.254: v1(184.388,49.3) U102.11@186.083,49.3
NetD102_2: D102.2 U102.10 | length 16.5
  Top Layer w0.254: D102.2@186.593,36.6 186.593,45.129 v1(189.719,48.255)
  MidLayer1 w0.254: v1@189.719,48.26 189.724,48.255 v1(192.183,48.255)
  Bottom Layer w0.254: v1(192.183,48.255) U102.10@192.183,49.3
NetD102_4: D102.4 U102.9 | length 15.5
  Top Layer w0.254: v1(190.488,49.95) 190.488,48.993 191.673,47.808 D102.4@191.673,36.6
  Bottom Layer w0.254: v1(190.488,49.95) U102.9@192.183,49.95
NetD102_5: D102.5 U102.15 | length 21
  Top Layer w0.254: v1(187.778,51.9) 190.035,51.9 194.213,47.722 D102.5@194.213,36.6
  Bottom Layer w0.254: U102.15@186.083,51.9 v1(187.778,51.9)
NetD102_6: D102.6 U102.7 | length 12.9
  Top Layer w0.254: v1(194.201,59.994) D102.6@194.201,62.6
  Bottom Layer w0.254: U102.7@192.183,51.25 192.222,51.289 193.483,51.289 194.201,52.006 v1(194.201,59.994)
NetD102_7: D102.7 U102.6 | length 13
  Top Layer w0.254: v1(191.673,59.994) D102.7@191.673,62.6
  Bottom Layer w0.254: v1(191.673,59.994) 193.747,57.92 193.747,52.194 193.453,51.9 U102.6@192.183,51.9
NetD102_9: D102.9 U102.12 | length 15.9
  Top Layer w0.254: D102.9@186.593,62.6 186.593,59.994 185.283,58.684 185.283,52.445 v1(187.778,49.95)
  Bottom Layer w0.254: U102.12@186.083,49.95 v1(187.778,49.95)
NetD102_10: D102.10 U102.14 | length 12.9
  Top Layer w0.254: v1(184.053,59.994) D102.10@184.053,62.6
  Bottom Layer w0.254: v1(184.053,59.994) 184.053,52.019 184.822,51.25 U102.14@186.083,51.25
NetD110_1: D110.1 U111.14 | length 12.3
  Top Layer w0.2: v1(150.8,61.398) D110.1@150.8,63.398
  MidLayer1 w0.2: v1(149.357,68.302) 148.707,67.652 148.707,66.732 150.8,64.639 v1(150.8,61.398)
  Bottom Layer w0.2: v1@149.357,68.287 U111.14@151.636,68.287
NetD110_2: D110.2 U111.12 | length 11.9
  Top Layer w0.2: v1(152.7,61.398) D110.2@152.7,63.398
  MidLayer1 w0.2: v1(149.357,67.002) 150.426,67.002 152.7,64.728 v1(152.7,61.398)
  Bottom Layer w0.2: v1@149.357,66.987 U111.12@151.636,66.987
NetD110_3: D110.3 U111.11 | length 9
  Top Layer w0.2: v1(154.6,61.398) D110.3@154.6,63.398
  Bottom Layer w0.2: U111.11@151.636,66.337 152.992,66.337 154.6,64.729 v1(154.6,61.398)
NetD110_4: D110.4 U111.10 | length 12
  Top Layer w0.2: v1(156.5,61.398) D110.4@156.5,63.398
  MidLayer1 w0.2: v1(156.5,61.398) 156.5,65.101 157.736,66.337 158.931,66.337 158.946,66.322 159.484,66.322 159.49,66.327 160.009,66.327 v1(160.015,66.322)
  Bottom Layer w0.2: U111.10@157.736,66.337 v1@160.015,66.337
NetD110_5: D110.5 U110.15 | length 21.2
  Top Layer w0.2: v1(158.4,61.398) D110.5@158.4,63.398
  MidLayer1 w0.2: v1(153.915,76.415) 153.915,67.783 v1(155.9,65.798)
  MidLayer2 w0.2: v1(155.9,65.798) 158.4,63.298 v1(158.4,61.398)
  Bottom Layer w0.2: U110.15@151.636,76.43 v1@153.915,76.43
NetD110_6: D110.6 U110.9 | length 11
  Top Layer w0.2: D110.6@157.2,65.798 157.2,72.45 v1(159.215,74.465)
  Bottom Layer w0.2: U110.9@157.736,74.48 v1@159.215,74.48
NetD110_7: D110.7 U110.10 | length 10.7
  Top Layer w0.2: D110.7@154.6,65.798 154.6,72.988 v1(155.457,73.845)
  Bottom Layer w0.2: v1@155.457,73.83 U110.10@157.736,73.83
NetD110_8: D110.8 U110.11 | length 10.3
  Top Layer w0.2: v1(150.157,73.845) 152,72.001 D110.8@152,65.798
  Bottom Layer w0.2: v1@150.157,73.83 U110.11@151.636,73.83
NetD110_9: D110.9 U110.14 | length 8.2
  Top Layer w0.2: v1(149.357,75.795) 150.426,75.795 152,77.368 D110.9@152,79.998
  Bottom Layer w0.2: v1@149.357,75.78 U110.14@151.636,75.78
NetD110_10: D110.10 U110.6 | length 6.2
  Top Layer w0.2: D110.10@154.6,79.998 154.6,77.301 v1(155.457,76.445)
  Bottom Layer w0.2: v1@155.457,76.43 U110.6@157.736,76.43
NetD110_11: D110.11 U110.7 | length 6.5
  Top Layer w0.2: D110.11@157.2,79.998 157.2,77.78 v1(159.215,75.765)
  Bottom Layer w0.2: U110.7@157.736,75.78 v1@159.215,75.78
NetD110_12: D110.12 U111.9 | length 22.5
  Top Layer w0.2: D110.12@158.4,82.398 v1(158.4,84.398)
  MidLayer1 w0.2: v1(158.4,84.398) 160.782,82.016 160.782,69.977 159.215,68.41 v1(159.215,66.972)
  Bottom Layer w0.2: U111.9@157.736,66.987 v1@159.215,66.987
NetD110_13: D110.13 U111.7 | length 19.7
  Top Layer w0.2: D110.13@156.5,82.398 v1(156.5,84.398)
  MidLayer1 w0.2: v1(156.257,68.302) 156.257,68.426 156.5,68.669 v1(156.5,84.398)
  Bottom Layer w0.2: v1@156.257,68.287 U111.7@157.736,68.287
NetD110_15: D110.15 U111.6 | length 20.9
  Top Layer w0.2: D110.15@152.7,82.398 v1(152.7,84.398)
  MidLayer1 w0.2: v1(152.7,84.398) 154.686,82.412 154.686,69.722 v1(155.457,68.952)
  Bottom Layer w0.2: v1@155.457,68.937 U111.6@157.736,68.937
NetD110_16: D110.16 U110.12 | length 14.4
  Top Layer w0.2: D110.16@150.8,82.398 v1(150.8,84.398)
  MidLayer1 w0.2: v1(150.8,84.398) 150.8,79.321 150.807,79.314 150.807,78.014 152.036,76.785 152.036,75.544 v1(153.115,74.465)
  Bottom Layer w0.2: U110.12@151.636,74.48 v1@153.115,74.48
NetD510_1: D510.1 U510.11 | length 12.8
  Top Layer w0.2: v1(87.44,42.6) D510.1@87.44,44.6
  MidLayer2 w0.2: v1(87.44,42.6) 87.44,44.289 89.827,46.675 v1(92.93,46.675)
  Bottom Layer w0.2: U510.11@90.27,46.675 v1(92.93,46.675)
NetD510_2: D510.2 U510.10 | length 12.3
  Top Layer w0.2: v1(88.88,42.6) D510.2@88.88,44.6
  MidLayer2 w0.2: v1(88.88,42.6) 88.88,44.56 90.32,46 93.835,46 v1(94.51,46.675)
  Bottom Layer w0.2: v1(94.51,46.675) U510.10@96.37,46.675
NetD510_4: D510.4 U510.9 | length 12
  Top Layer w0.2: v1(91.76,42.6) D510.4@91.76,44.6
  MidLayer2 w0.2: v1(91.76,42.6) 95.16,46 95.16,46.944 94.78,47.325 v1(93.71,47.325)
  Bottom Layer w0.2: v1(93.71,47.325) U510.9@96.37,47.325
NetD510_5: D510.5 U510.15 | length 15.4
  Top Layer w0.2: v1(93.2,42.6) D510.5@93.2,44.6
  MidLayer2 w0.2: v1(92.93,49.275) 93.58,49.925 94.78,49.925 95.56,49.144 95.56,44.96 v1(93.2,42.6)
  Bottom Layer w0.2: U510.15@90.27,49.275 v1(92.93,49.275)
NetD510_6: D510.6 U510.7 | length 8.8
  Top Layer w0.2: D510.6@93.2,54.6 93.2,52.524 93.71,52.014 v1(93.71,48.625)
  Bottom Layer w0.2: v1(93.71,48.625) U510.7@96.37,48.625
NetD510_7: D510.7 U510.6 | length 13.6
  Top Layer w0.2: D510.7@91.76,54.6 91.76,56.2 92.075,56.515 93.56,56.515 94.467,55.607 94.467,55.012 95.16,54.319 95.16,49.925 v1(94.51,49.275)
  Bottom Layer w0.2: v1(94.51,49.275) U510.6@96.37,49.275
NetD510_9: D510.9 U510.12 | length 10.6
  Top Layer w0.2: D510.9@88.88,54.6 88.88,52.256 91.861,49.275 91.9,49.275 92.28,48.894 92.28,48.356 92.257,48.332 92.257,47.692 92.226,47.661 92.226,47.421 v1(92.13,47.325)
  Bottom Layer w0.2: U510.12@90.27,47.325 v1(92.13,47.325)
NetD510_10: D510.10 U510.14 | length 9.1
  Top Layer w0.2: D510.10@87.44,54.6 87.44,52.815 v1(91.63,48.625)
  Bottom Layer w0.2: U510.14@90.27,48.625 v1(91.63,48.625)
NetD511_1: D511.1 U511.11 | length 11.5
  Top Layer w0.2: v1(80.44,42.6) D511.1@80.44,44.6
  MidLayer2 w0.2: v1(80.44,42.6) 80.44,44.071 83.044,46.675 v1(84.73,46.675)
  Bottom Layer w0.2: U511.11@82.07,46.675 v1(84.73,46.675)
NetD511_2: D511.2 U511.10 | length 10.9
  Top Layer w0.2: v1(81.88,42.6) D511.2@81.88,44.6
  MidLayer2 w0.2: v1(81.88,42.6) 81.88,44.258 83.076,45.453 84.428,45.453 85.65,46.675 v1(86.31,46.675)
  Bottom Layer w0.2: v1(86.31,46.675) U511.10@88.17,46.675
NetD511_4: D511.4 U511.9 | length 9.7
  Top Layer w0.2: v1(84.76,42.6) D511.4@84.76,44.6
  MidLayer2 w0.2: v1(84.76,42.6) 85.51,43.35 v1(85.51,47.325)
  Bottom Layer w0.2: v1(85.51,47.325) U511.9@88.17,47.325
NetD511_5: D511.5 U511.15 | length 14.6
  Top Layer w0.2: v1(86.2,42.6) D511.5@86.2,44.6
  MidLayer2 w0.2: v1(84.73,49.275) 85.38,49.925 86.58,49.925 86.96,49.544 86.96,43.36 v1(86.2,42.6)
  Bottom Layer w0.2: U511.15@82.07,49.275 v1(84.73,49.275)
NetD511_6: D511.6 U511.7 | length 10.2
  Top Layer w0.2: v1(85.51,48.625) 86.58,48.625 86.96,49.006 86.96,52.794 86.55,53.204 86.55,54.25 D511.6@86.2,54.6
  Bottom Layer w0.2: v1(85.51,48.625) U511.7@88.17,48.625
NetD511_7: D511.7 U511.6 | length 7.8
  Top Layer w0.2: D511.7@84.76,54.6 84.76,52.764 86.31,51.214 v1(86.31,49.275)
  Bottom Layer w0.2: v1(86.31,49.275) U511.6@88.17,49.275
NetD511_9: D511.9 U511.12 | length 10.1
  Top Layer w0.2: D511.9@81.88,54.6 81.88,51.056 83.661,49.275 83.7,49.275 84.08,48.894 84.08,48.244 84.08,47.692 84.026,47.638 84.026,47.421 v1(83.93,47.325)
  Bottom Layer w0.2: U511.12@82.07,47.325 v1(83.93,47.325)
NetD511_10: D511.10 U511.14 | length 8.6
  Top Layer w0.2: D511.10@80.44,54.6 80.44,51.615 v1(83.43,48.625)
  Bottom Layer w0.2: U511.14@82.07,48.625 v1(83.43,48.625)
NetD512_1: D512.1 U512.11 | length 10
  Top Layer w0.2: v1(73.44,42.6) D512.1@73.44,44.6
  MidLayer2 w0.2: v1(73.44,42.6) 73.44,43.585 v1(76.53,46.675)
  Bottom Layer w0.2: U512.11@73.87,46.675 v1(76.53,46.675)
NetD512_2: D512.2 U512.10 | length 9.3
  Top Layer w0.2: v1(74.88,42.6) D512.2@74.88,44.6
  MidLayer2 w0.2: v1(74.88,42.6) 74.88,43.445 v1(78.11,46.675)
  Bottom Layer w0.2: v1(78.11,46.675) U512.10@79.97,46.675
NetD512_4: D512.4 U512.9 | length 9.6
  Top Layer w0.2: v1(77.76,42.6) D512.4@77.76,44.6
  MidLayer2 w0.2: v1(77.31,47.325) 77.31,43.05 v1(77.76,42.6)
  Bottom Layer w0.2: v1(77.31,47.325) U512.9@79.97,47.325
NetD512_5: D512.5 U512.15 | length 14.4
  Top Layer w0.2: v1(79.2,42.6) D512.5@79.2,44.6
  MidLayer2 w0.2: v1(76.53,49.275) 77.18,49.925 77.841,49.925 78.38,49.925 79.2,49.104 v1(79.2,42.6)
  Bottom Layer w0.2: U512.15@73.87,49.275 v1(76.53,49.275)
NetD512_6: D512.6 U512.7 | length 10
  Top Layer w0.2: v1(77.31,48.625) 78.38,48.625 79.2,49.446 D512.6@79.2,54.6
  Bottom Layer w0.2: v1(77.31,48.625) U512.7@79.97,48.625
NetD512_7: D512.7 U512.6 | length 7.9
  Top Layer w0.2: D512.7@77.76,54.6 78.11,54.25 78.11,53.111 78.76,52.461 78.76,49.925 v1(78.11,49.275)
  Bottom Layer w0.2: v1(78.11,49.275) U512.6@79.97,49.275
NetD512_9: D512.9 U512.12 | length 9.6
  Top Layer w0.2: D512.9@74.88,54.6 74.88,49.856 75.461,49.275 75.5,49.275 75.88,48.894 75.88,48.244 75.88,47.692 75.826,47.638 75.826,47.421 v1(75.73,47.325)
  Bottom Layer w0.2: U512.12@73.87,47.325 v1(75.73,47.325)
NetD512_10: D512.10 U512.14 | length 8.1
  Top Layer w0.2: D512.10@73.44,54.6 73.44,50.415 v1(75.23,48.625)
  Bottom Layer w0.2: U512.14@73.87,48.625 v1(75.23,48.625)
NetD513_1: D513.1 U513.11 | length 9.5
  Top Layer w0.2: v1(66.44,42.6) D513.1@66.44,44.6
  MidLayer2 w0.2: v1(66.44,42.6) 66.44,44.785 v1(68.33,46.675)
  Bottom Layer w0.2: U513.11@65.67,46.675 v1(68.33,46.675)
NetD513_2: D513.2 U513.10 | length 8.8
  Top Layer w0.2: v1(67.88,42.6) D513.2@67.88,44.6
  MidLayer2 w0.2: v1(67.88,42.6) 67.88,44.645 v1(69.91,46.675)
  Bottom Layer w0.2: v1(69.91,46.675) U513.10@71.77,46.675
NetD513_4: D513.4 U513.9 | length 10.7
  Top Layer w0.2: v1(70.76,42.6) D513.4@70.76,44.6
  MidLayer2 w0.2: v1(69.11,47.325) 70.18,47.325 70.76,46.744 v1(70.76,42.6)
  Bottom Layer w0.2: v1(69.11,47.325) U513.9@71.77,47.325
NetD513_5: D513.5 U513.15 | length 14.9
  Top Layer w0.2: v1(72.2,42.6) D513.5@72.2,44.6
  MidLayer2 w0.2: v1(68.33,49.275) 68.98,49.925 70.18,49.925 72.2,47.904 v1(72.2,42.6)
  Bottom Layer w0.2: U513.15@65.67,49.275 v1(68.33,49.275)
NetD513_6: D513.6 U513.7 | length 10.5
  Top Layer w0.2: v1(69.11,48.625) 70.18,48.625 72.2,50.646 D513.6@72.2,54.6
  Bottom Layer w0.2: v1(69.11,48.625) U513.7@71.77,48.625
NetD513_7: D513.7 U513.6 | length 7.5
  Top Layer w0.2: v1(69.91,49.275) 70.76,50.125 D513.7@70.76,54.6
  Bottom Layer w0.2: v1(69.91,49.275) U513.6@71.77,49.275
NetD513_9: D513.9 U513.12 | length 10
  Top Layer w0.2: v1(67.53,47.325) 67.626,47.421 67.626,47.638 67.68,47.692 67.68,48.244 67.68,48.894 67.3,49.275 67.261,49.275 66.88,49.656 66.88,52.739 67.441,53.3 67.53,53.3 67.88,53.65 D513.9@67.88,54.6
  Bottom Layer w0.2: U513.12@65.67,47.325 v1(67.53,47.325)
NetD513_10: D513.10 U513.14 | length 7.6
  Top Layer w0.2: D513.10@66.44,54.6 66.44,49.215 v1(67.03,48.625)
  Bottom Layer w0.2: U513.14@65.67,48.625 v1(67.03,48.625)
NetD514_1: D514.1 U514.11 | length 9
  Top Layer w0.2: v1(59.44,42.6) D514.1@59.44,44.6
  MidLayer2 w0.2: v1(59.44,42.6) 59.44,45.985 v1(60.13,46.675)
  Bottom Layer w0.2: U514.11@57.47,46.675 v1(60.13,46.675)
NetD514_2: D514.2 U514.10 | length 8.3
  Top Layer w0.2: v1(60.88,42.6) D514.2@60.88,44.6
  MidLayer2 w0.2: v1(60.88,42.6) 60.88,45.845 v1(61.71,46.675)
  Bottom Layer w0.2: v1(61.71,46.675) U514.10@63.57,46.675
NetD514_4: D514.4 U514.9 | length 11.2
  Top Layer w0.2: v1(63.76,42.6) D514.4@63.76,44.6
  MidLayer2 w0.2: v1(60.91,47.325) 61.98,47.325 63.76,45.544 v1(63.76,42.6)
  Bottom Layer w0.2: v1(60.91,47.325) U514.9@63.57,47.325
NetD514_5: D514.5 U514.15 | length 15.4
  Top Layer w0.2: v1(65.2,42.6) D514.5@65.2,44.6
  MidLayer2 w0.2: v1(60.13,49.275) 60.78,49.925 61.98,49.925 65.2,46.704 v1(65.2,42.6)
  Bottom Layer w0.2: U514.15@57.47,49.275 v1(60.13,49.275)
NetD514_6: D514.6 U514.7 | length 11.5
  Top Layer w0.2: v1(60.91,48.625) 62.77,48.625 65.2,51.055 D514.6@65.2,54.6
  Bottom Layer w0.2: v1(60.91,48.625) U514.7@63.57,48.625
NetD514_7: D514.7 U514.6 | length 8
  Top Layer w0.2: v1(61.71,49.275) 63.76,51.325 D514.7@63.76,54.6
  Bottom Layer w0.2: v1(61.71,49.275) U514.6@63.57,49.275